# Altium PCB Left_Ref_Sensor.PcbDoc
Units mil, origin at the board's own origin, x right, y up, seen from the top; angles counter-clockwise.
Board outline 1190 x 1190 mil, 2 copper layers (Top Layer, Bottom Layer); 4 components, 6 nets, 27 pads, 5 vias.
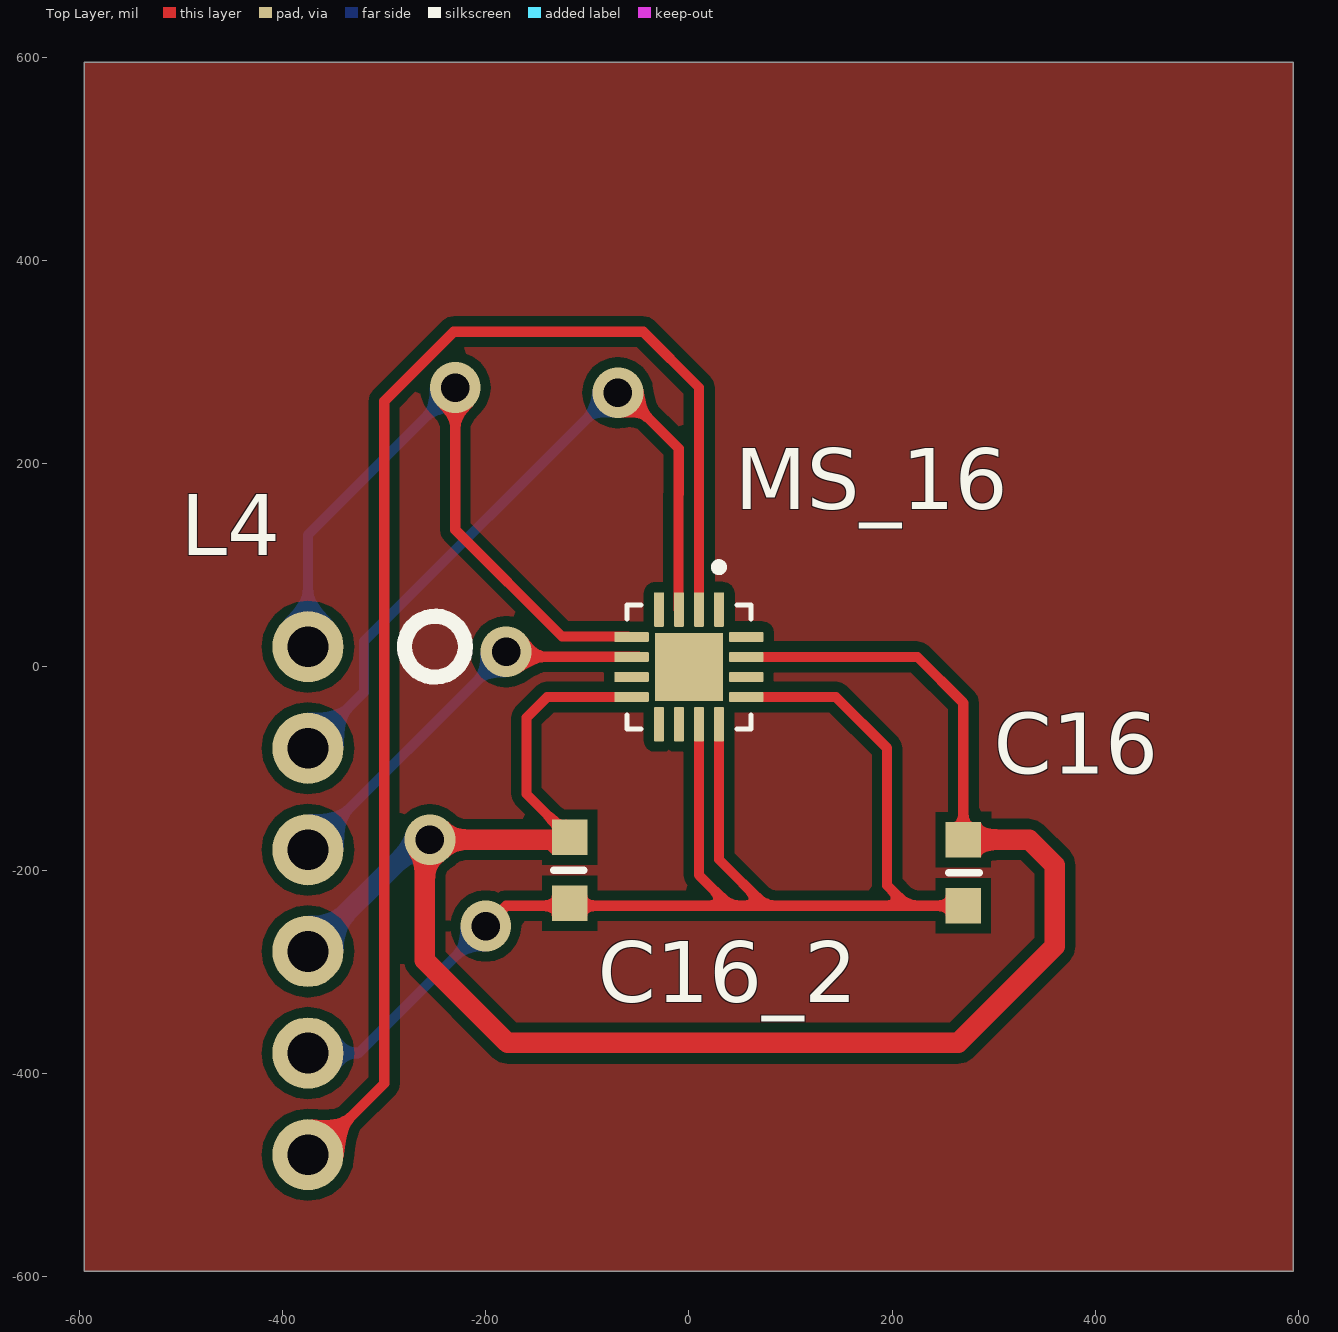
[diagram p0: Top Layer view]
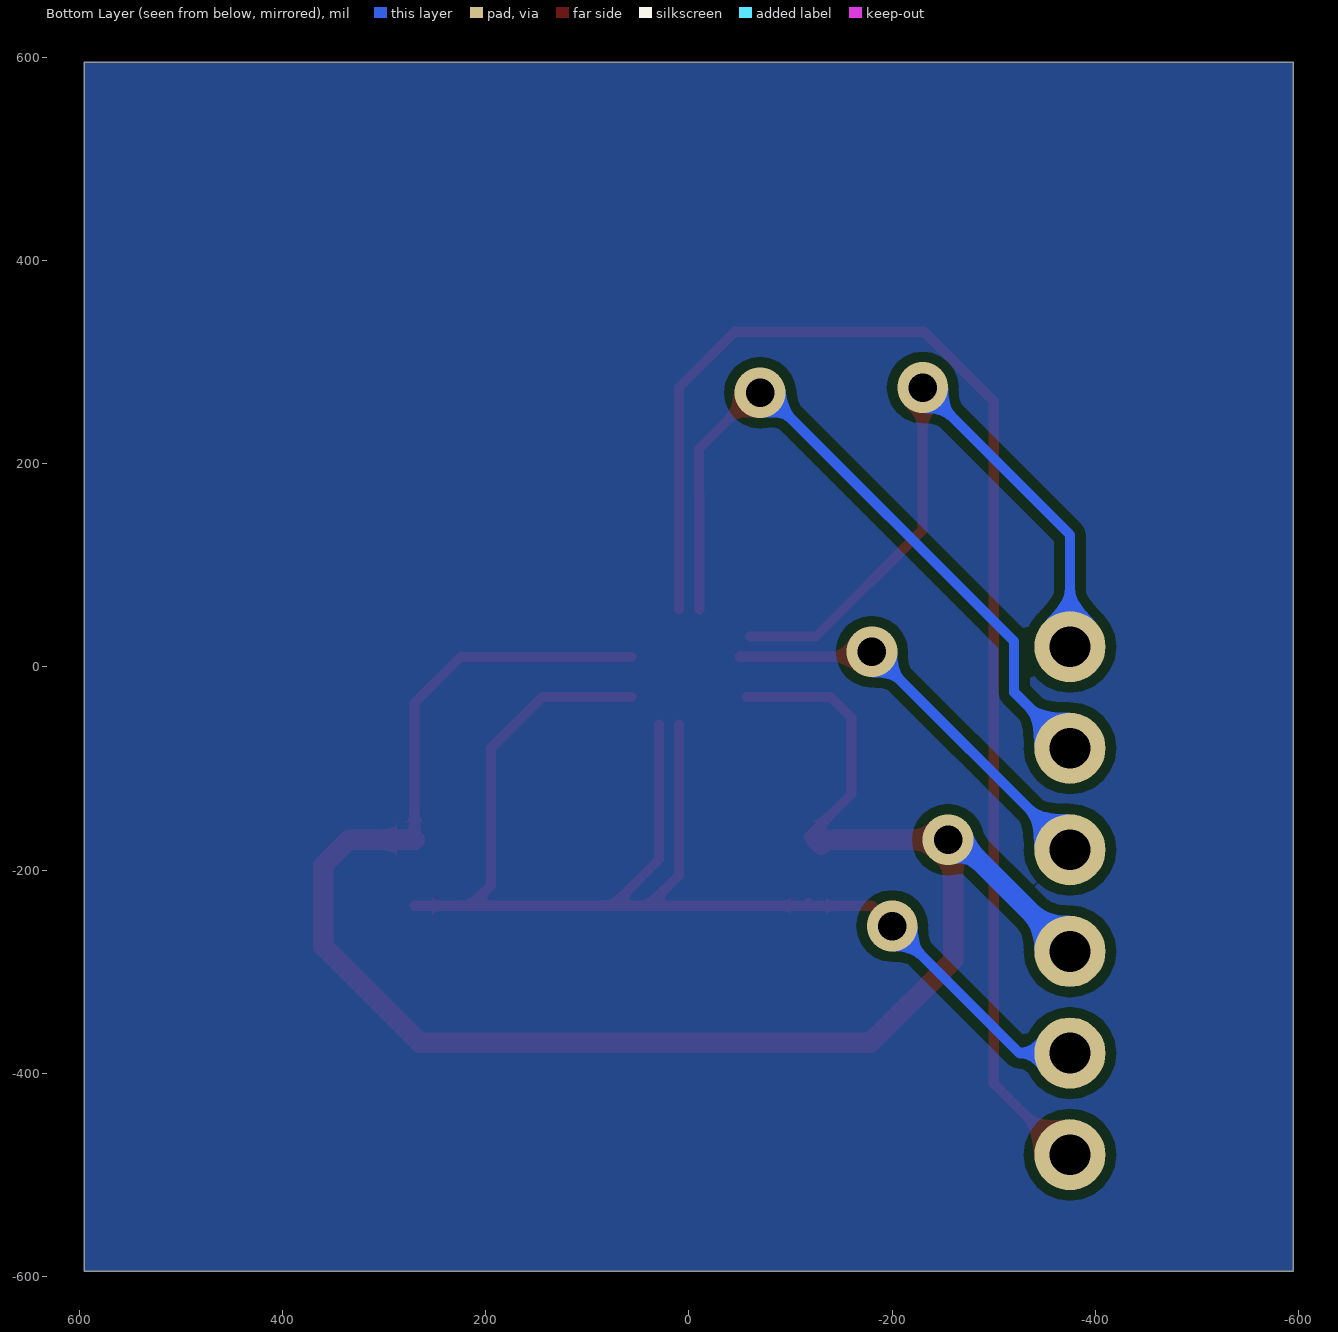
[diagram p1: Bottom Layer view, seen from below]

## Layer stack, top to bottom
Top Solder: solder mask 0.4, Solder Resist, Dk 3.5
Top Layer: signal copper 1.4
Dielectric 1: dielectric 12.6, FR-4, Dk 4.8
Bottom Layer: signal copper 1.4
Bottom Solder: solder mask 0.4, Solder Resist, Dk 3.5

## Board outline
-595,-595 595,-595 595,595 -595,595

## Design rules (kind name [scope] priority, off if disabled: settings)
Clearance [All] p1: gap=10 ignorepadtopadclearanceinfootprint=FALSE except(0: Arc-Hole Track-Hole SMDPad-Hole THPad-Hole Via-Hole Fill-Hole Poly-Hole Region-Hole Text-Hole)
PolygonConnect [All] p1: connectstyle=Relief reliefconductorwidth=10 reliefentries=4 polygonreliefangle="90 Angle" airgapwidth=10
RoutingVias [All] p1: holewidth=28 width=50 viastyle="Through Hole" minholewidth=28 minwidth=50 maxholewidth=28 maxwidth=50
SolderMaskExpansion [All] p1: expansion=4 istentingtop=FALSE
Width [All] p1: maxlimit=10 minlimit=10 preferedwidth=10
30 further rules are at their usual default settings.

## Classes and differential pairs
component class Left_2_SchDoc: C16 C16_2 MS_16

## Components (designator, comment, footprint, x,y, rotation, side; value= is the part's Value field where it differs from the comment)
C16 "0.1uF" CAP_0603 270,-202.5 r90 top
C16_2 "0.1uF" CAP_0603 -117.5,-200 r270 top
L4 "PIN_left" PIN_LEFT_4 -375,-480 r0 top (schematic designator CON_L_4)
MS_16 "MLX90393SLW ABA 011 RE" MLX90393 0,0 r270 top

## Footprints (in the part's own frame and the unit in brackets; to place one, negate y for a bottom-side part, rotate by r counter-clockwise, add the part's x,y. Pads: shape width x height; smd on the part's side, far side on the other; paste and mask are expansions set on the pad)
CAP_0603 [mil]
  rect 35x35 smd: 1(-32.5,0) 2(32.5,0)
  silkscreen extent 0,-16 0,14, body extent -53,-18 49,21, height 35
MLX90393 [mm]
  rrect25% 0.86x0.26 smd: 1(-1.435,0.75) 2(-1.435,0.25) 3(-1.435,-0.25) 4(-1.435,-0.75) 9(1.435,-0.75) 10(1.435,-0.25) 11(1.435,0.25) 12(1.435,0.75)
  rrect25% 0.26x0.86 smd: 5(-0.75,-1.435) 6(-0.25,-1.435) 7(0.25,-1.435) 8(0.75,-1.435) 13(0.75,1.435) 14(0.25,1.435) 15(-0.25,1.435) 16(-0.75,1.435)
  rect 1.71x1.71 smd paste-2: 17(0,0)
  silkscreen extent -2.59,-1.55 1.55,1.55
PIN_LEFT_4 [mil]
  round 70 hole 40: 1(0,500) 2(0,400) 3(0,300) 4(0,200) 5(0,100) 6(0,0)
  silkscreen extent 95,470 155,530

## Part data
C16 C16_2: library part CAP, "Capacitance"
L4: library part PIN_left_4
MS_16: "MLX90393 Sensor"

## Via types
v1: diameter 50, hole 28, Top Layer to Bottom Layer, 5 vias

## Nets (pads, with @x,y where several pads share a name; then routed paths per layer and width w, separated by ;. In a path a pad name is that pad's centre, name@x,y a point inside that pad or via, vN(x,y) a via of type N, cw(c..) or ccw(c..) an arc to the next point about the centre after c; other vN are vias at no path point)
16: L4.6 MS_16.2 | length 1355.1
  Top Layer w10: L4.6 -370,-480 -300,-410 -300,261.57 -231.57,330 -45,330 9.84,275.16 MS_16.2
GND: C16.1 C16_2.2 L4.5 MS_16.11 MS_16.12 MS_16.13 | length 1414.6
  Top Layer w10: v1(-200,-255) -180,-235 -120,-235 C16_2.2 ; C16_2.2@-115,-235 40,-235 ; MS_16.11 9.84,-204.84 40,-235 ; MS_16.12 29.53,-189.53 75,-235 ; MS_16.13 144.53,-29.53 195,-80 195,-215 215,-235 ; C16.1 215,-235 ; 40,-235 75,-235 ; 75,-235 215,-235
  Bottom Layer w10: L4.5 -325,-380 v1(-200,-255)
MISO: L4.3 MS_16.6 | length 407.8
  Top Layer w10: v1(-180,15) -175,10 MS_16.6@-50,10
  Bottom Layer w10: L4.3 v1(-180,15)
MOSI: L4.1 MS_16.5 | length 668.6
  Top Layer w10: v1(-230,275) -230,135 -125,30 MS_16.5@-60,30
  Bottom Layer w10: L4.1 -375,130 v1(-230,275)
SCL: L4.2 MS_16.3 | length 720.7
  Top Layer w10: v1(-70,270) -65,270 -10,215 -10,170.55 -10.28,170.28 MS_16.3@-10.28,56.5
  Bottom Layer w10: L4.2 -320,-25 -320,25 -75,270 v1(-70,270)
VCC: C16.2 C16_2.1 L4.4 MS_16.8 MS_16.15 | length 1914.9
  Top Layer w10: C16_2.1@-125,-170 C16_2.1@-120,-165 ; C16_2.1 C16_2.1@-120,-165 ; MS_16.8 -139.53,-29.53 -160,-50 -160,-125 C16_2.1@-120,-165 ; MS_16.15 224.84,9.84 270,-35.32 C16.2
  Top Layer w20: C16_2.1@-125,-170 -130,-175 -135,-170 v1(-255,-170) -260,-175 -260,-288.64 -178.64,-370 265,-370 360,-275 360,-195 335,-170 C16.2
  Bottom Layer w20: L4.4 -270.74,-175.74 -260.74,-175.74 v1(-255,-170)
pads on no net: MS_16.1 MS_16.4 MS_16.7 MS_16.9 MS_16.10 MS_16.14 MS_16.16 MS_16.17

## Polygon pours and split planes (outlines as drawn)
no net on Mechanical 1 "NONET_L02_P-001" (solid): -595,595 595,595
no net on Mechanical 1 "NONET_L02_P-001" (solid): -595,595
no net on Top Layer "NONET_L01_P014" (solid, pour order 14): -595,595 -595,-595 595,-595 595,595
no net on Top Layer "NONET_L01_P005" (solid, pour order 5): -610,610
no net on Top Layer "NONET_L01_P004" (solid, pour order 4): -600,610
no net on Bottom Layer "NONET_L02_P013" (solid, pour order 13): -595,595 -595,-595 595,-595 595,595

## Silkscreen, mask and mechanical layers (free items; w line width, h text height)
Mechanical 1:
  the board outline again, w10